# EAGLE board Diseño Electronico - Tinkercad (EAGLE 9.7.0)

Size 200.85 x 147.58 mm. Coordinates in mm from the lower left corner, seen from the top.
Outline: 0,0 200.85,0 200.85,147.59 0,147.59 0,0
Copper layers (1*16): Top 0.035mm / dielectric 1.5mm / Bottom 0.035mm
Design rules "default": minimum track width 6mil, minimum drill 0.35mm, track to track 6mil, track to pad 6mil, pad to pad 6mil, via to via 6mil, smd to smd 6mil, copper to edge 40mil, drill to drill 6mil, minimum pad ring 10mil, minimum via ring 8mil, stop-mask expansion 4mil, vias tented up to drill 0mil, thermal gap 10mil

## Footprints (pad centres in the part's own frame; a part is rotated, then mirrored left to right if it is on the bottom)
BATTERY-GENERIC = drill 1.118 pad 3.15 octagon: + 2.54,0; - -2.54,0
LEDRD254W60D565H860B = drill 0.981 pad 1.581: 1 -1.27,0; 2 1.27,0
LEDRD254W60D565H860B_W = drill 0.981 pad 1.581: 1 -1.27,0; 2 1.27,0
LU-5-R = drill 0.8: 1 -6.35,-3.81; 5 3.81,-3.81; 6 6.35,-3.81; 7 6.35,3.81; 8 3.81,3.81; 12 -6.35,3.81
DG01D = drill 1.118 pad 3.15 octagon: + 2.54,0; - -2.54,0
MOTOR = drill 1.118 pad 3.15 octagon: + 2.54,0; - -2.54,0
PIEZO = drill 1 pad 1.6: 1 -3.5,0; 2 3.5,0
RESAD1016W63L850D250B = drill 0.83 pad 1.43: 1 -5.08,0; 2 5.08,0
SG90 = drill 1.016 long: 1 -2.54,0; 2 0,0; 3 2.54,0
ARDUINO-UNO-R3-SHIELD = drill 1.016 pad 1.88: 3.3V 24.13,-2.54; 5V 24.13,0; A0 24.13,12.7; A1 24.13,15.24; A2 24.13,17.78; A3 24.13,20.32; A4 24.13,22.86; A5 24.13,25.4; AREF -24.13,-13.97; D2 -24.13,20.32; D3 -24.13,17.78; D4 -24.13,15.24; D5 -24.13,12.7; D6 -24.13,10.16; D7 -24.13,7.62; D8 -24.13,3.81; D9 -24.13,1.27; D10 -24.13,-1.27; D11 -24.13,-3.81; D12 -24.13,-6.35; D13 -24.13,-8.89; GND@0 24.13,2.54; GND@1 24.13,5.08; GND@2 -24.13,-11.43; IOREF 24.13,-7.62; NC 24.13,-10.16; RES 24.13,-5.08; RX -24.13,25.4; SCL -24.13,-19.05; SDA -24.13,-16.51; TX -24.13,22.86; VIN 24.13,7.62

## Placement (x,y rotation side)
BAT1  9V  [BATTERY-GENERIC]  8.26,53.11 180 top
D1  RED  [LEDRD254W60D565H860B]  75.84,106.53 180 top
D2  WHITE  [LEDRD254W60D565H860B_W]  66.17,106.07 180 top
K1  RELAY-SPDT_LU-5-R  [LU-5-R]  135.63,12.04 180 top
M1  MOTOR_DG01D  [DG01D]  126.55,134.88 90 top
M2  MOTOR_DG01D  [DG01D]  125.98,96.42 90 top
M3  MOTOR_HDR  [MOTOR]  123.51,54.66 270 top
PIEZO1  PIEZO  [PIEZO]  65.06,121.1 0 top
R1  1k  [RESAD1016W63L850D250B]  77.11,101.45 90 top
R2  1k  [RESAD1016W63L850D250B]  67.44,100.99 90 top
SERVO1  SERVOSG90  [SG90]  44.42,7.08 0 top
SERVO2  SERVOSG90  [SG90]  91.71,7.11 0 top
SERVO3  SERVOSG90  [SG90]  115.36,7.17 0 top
SERVO4  SERVOSG90  [SG90]  68.95,6.99 0 top
U1  ARDUINO-UNO-R3-SHIELD  [ARDUINO-UNO-R3-SHIELD]  76.31,59.33 270 top

## Library data of the parts
BAT1 K1 M1-M3 PIEZO1 R1 R2 SERVO1-SERVO4 U1 = Tinkercad
D1 = Tinkercad; CATEGORY: Opto-Electronic; SUB-CATEGORY: LED; VALUE: LED_RED
D2 = Tinkercad; CATEGORY: Opto-Electronic; SUB-CATEGORY: LED; VALUE: LED_WHITE

## Nets
D1_A: D1.1 R1.2
D2_A: D2.1 R2.2
U1_5V: K1.6 SERVO1.2 SERVO2.2 SERVO3.2 SERVO4.2 U1.5V
U1_D2: PIEZO1.1 U1.D2
U1_D3: M3.+ U1.D3
U1_D4: SERVO3.3 U1.D4
U1_D5: SERVO2.3 U1.D5
U1_D6: SERVO4.3 U1.D6
U1_D7: SERVO1.3 U1.D7
U1_D8: M2.+ U1.D8
U1_D9: M2.- U1.D9
U1_D10: M1.+ U1.D10
U1_D11: M1.- U1.D11
U1_D12: R1.1 U1.D12
U1_D13: R2.1 U1.D13
U1_GND: D1.2 D2.2 K1.5 M3.- PIEZO1.2 SERVO1.1 SERVO2.1 SERVO3.1 SERVO4.1 U1.GND@0 U1.GND@1 U1.GND@2
U1_TX: K1.8 U1.TX

## Tracks (layer width: path | path; a pad name or v marks a point on that pad's centre or on a via)
D1_A  (1 unrouted)
D2_A  (1 unrouted)
U1_5V  (5 unrouted)
U1_D2  (1 unrouted)
U1_D3  (1 unrouted)
U1_D4  (1 unrouted)
U1_D5  (1 unrouted)
U1_D6  (1 unrouted)
U1_D7  (1 unrouted)
U1_D8  (1 unrouted)
U1_D9  (1 unrouted)
U1_D10  (1 unrouted)
U1_D11  (1 unrouted)
U1_D12  (1 unrouted)
U1_D13  (1 unrouted)
U1_GND  (11 unrouted)
U1_TX  (1 unrouted)